# Altium PCB InvestiGator.PcbDoc
Units mil, origin at the board's own origin, x right, y up, seen from the top; angles counter-clockwise.
Board outline 4000 x 3000 mil, 2 copper layers (Top Layer, Bottom Layer); 85 components, 52 nets, 300 pads, 6 vias.
Unrouted connection lines stored in the file: 1.
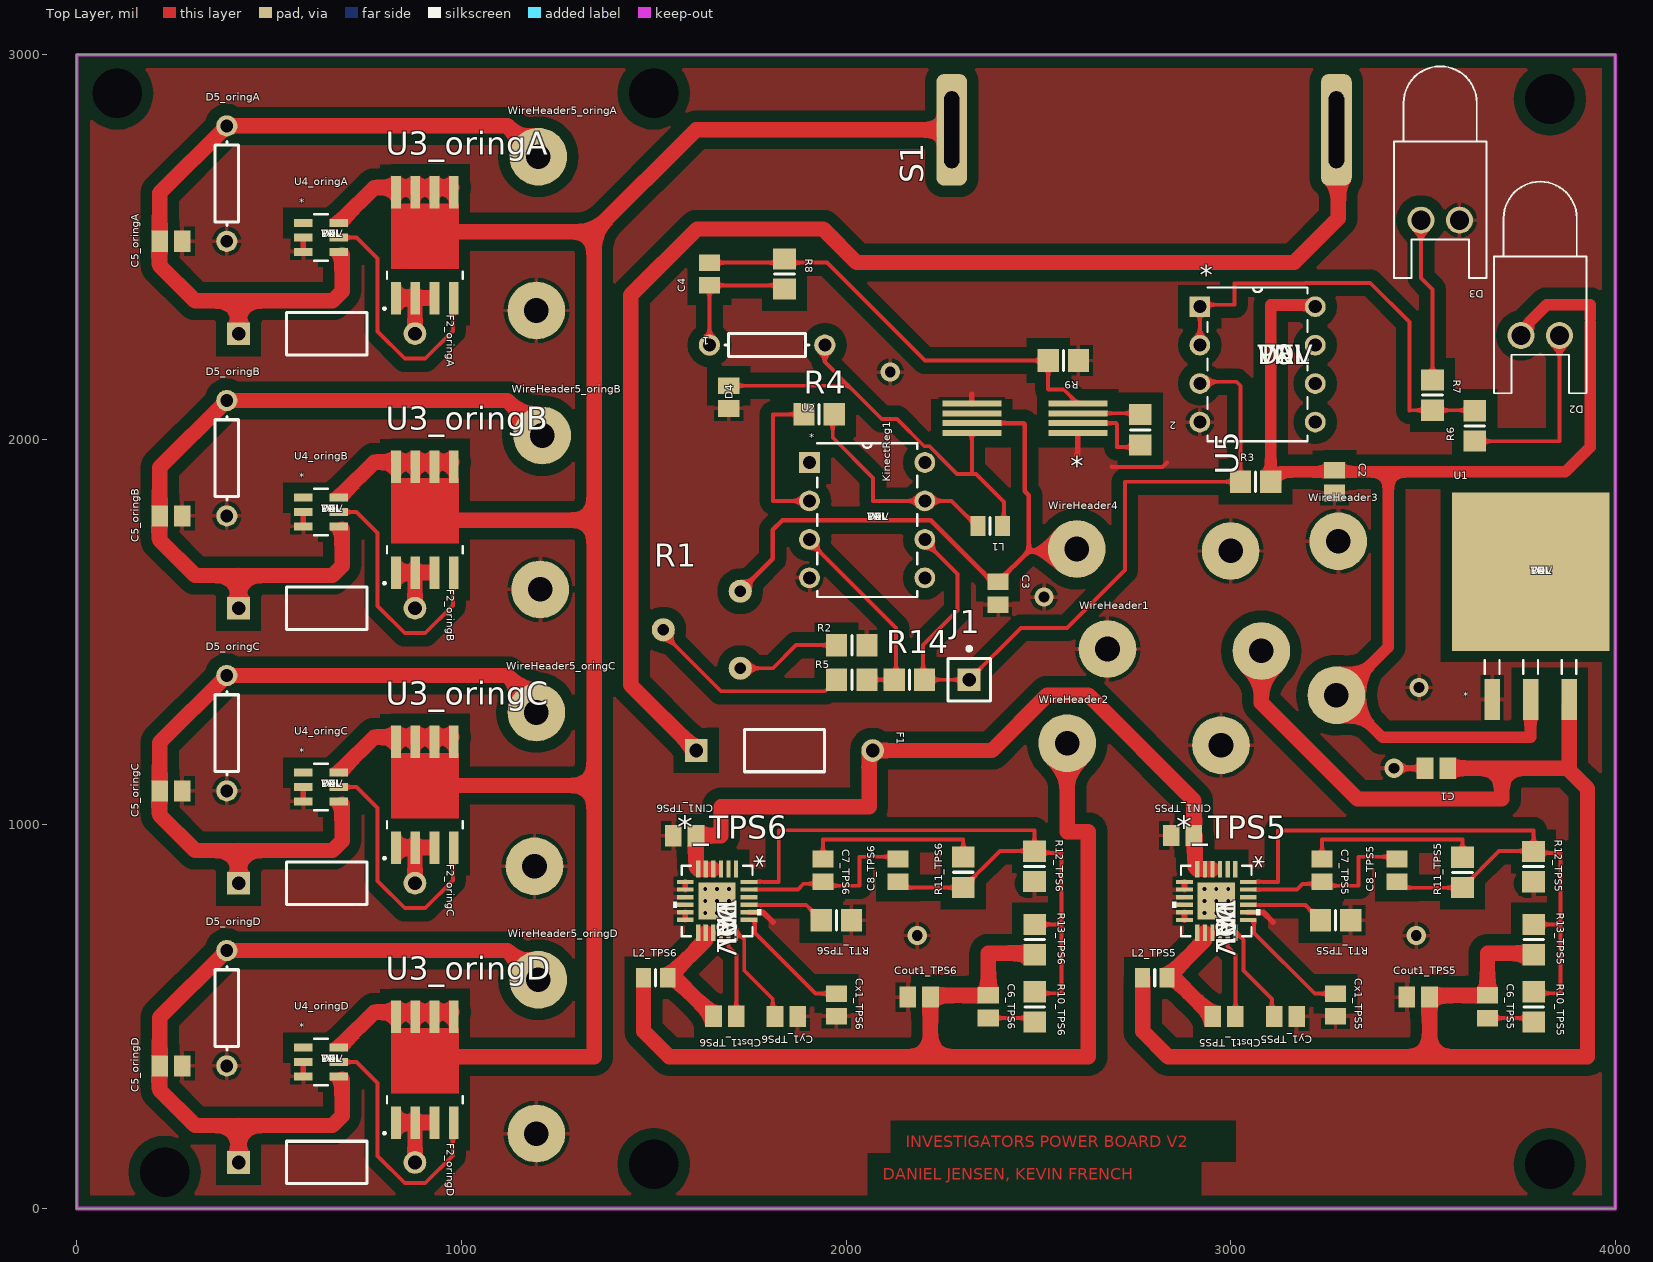
[diagram p0: Top Layer view]
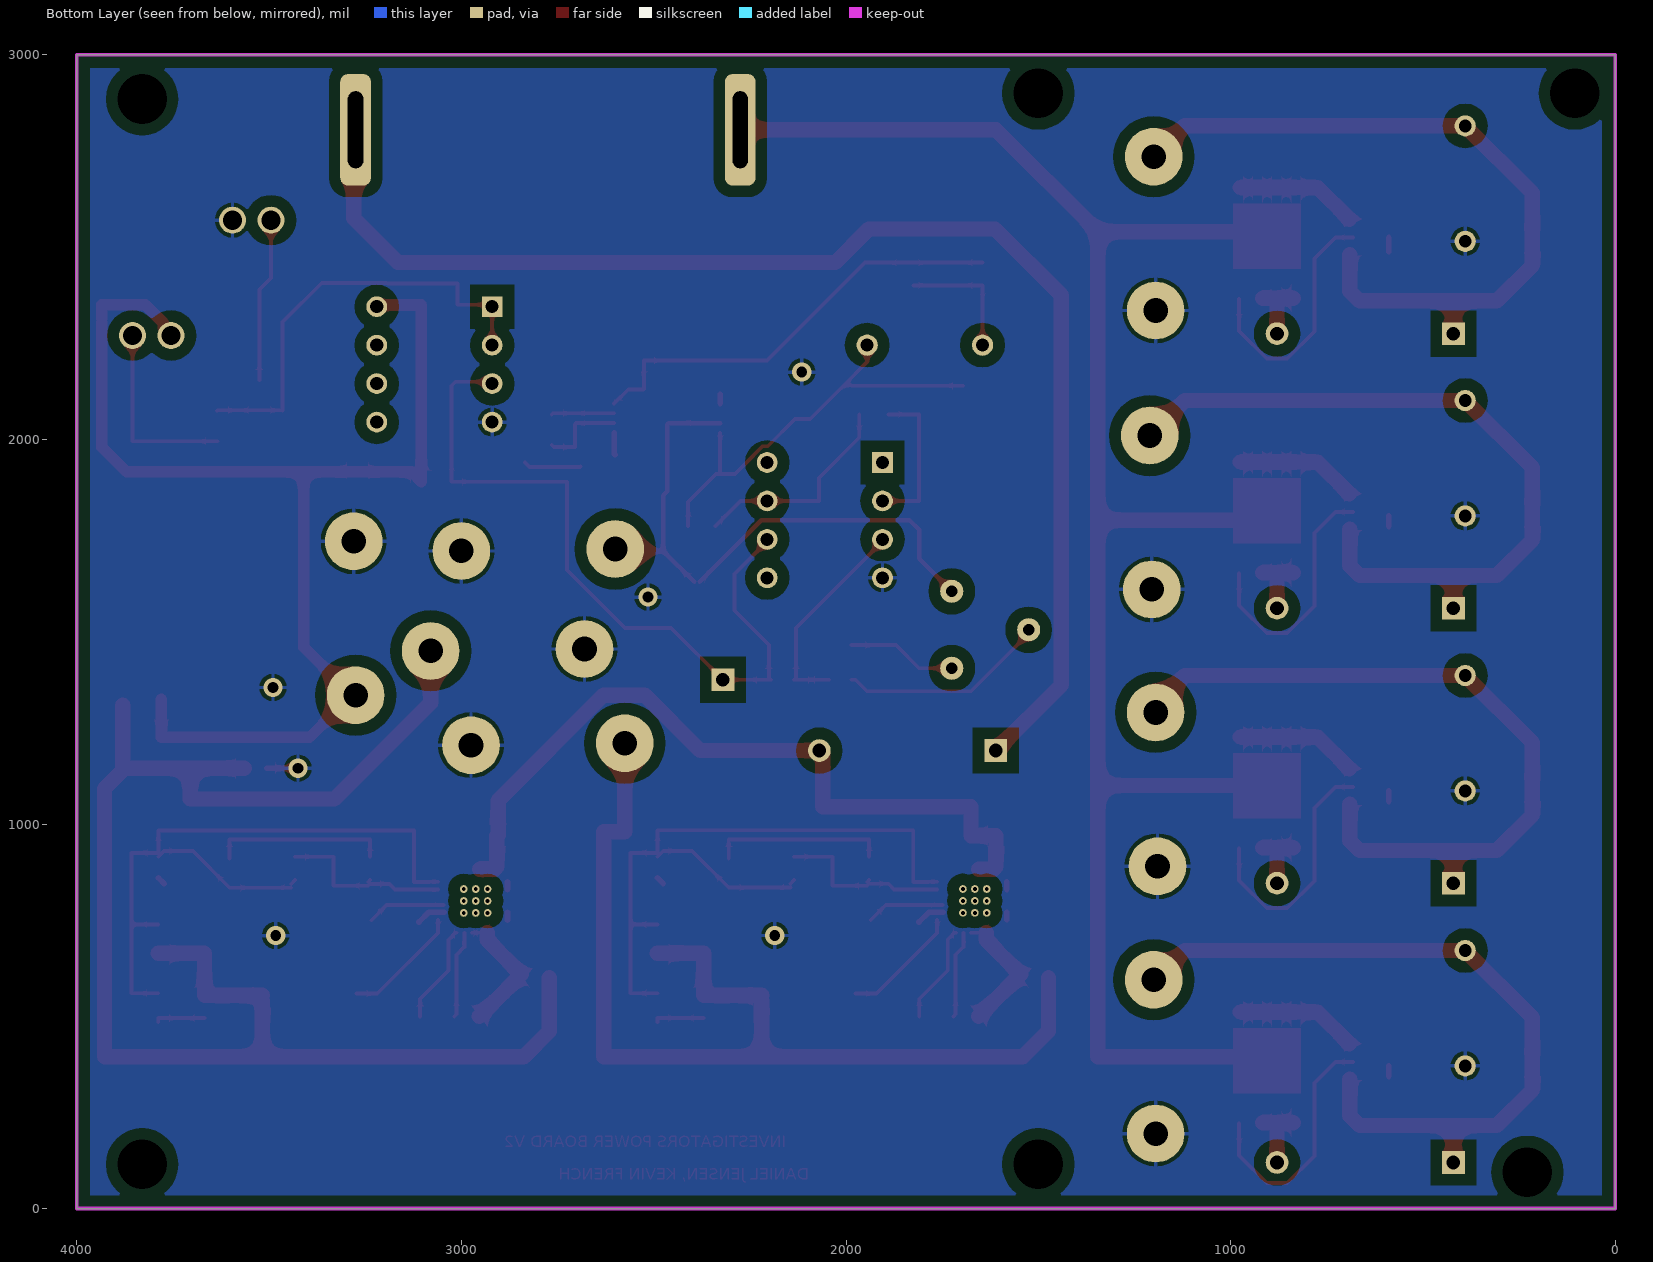
[diagram p1: Bottom Layer view, seen from below]

## Layer stack, top to bottom
Top Solder: solder mask 0.4, Solder Resist, Dk 3.5
Top Layer: signal copper 1.4
Dielectric1: dielectric 12.6, FR-4, Dk 4.8
Bottom Layer: signal copper 1.4
Bottom Solder: solder mask 0.4, Solder Resist, Dk 3.5

## Board outline
0,0 0,3000 4000,3000 4000,0

## Design rules (kind name [scope] priority, off if disabled: settings)
Clearance "Schematic Clearance Constraint_41" [InNet('Net*_TPS6_13')] p1: gap=30
Clearance "Schematic Clearance Constraint_40" [InNet('NetF2_oringA_2')] p2: gap=30
Clearance "Schematic Clearance Constraint_39" [InNet('BAT_oringD')] p3: gap=30
Clearance "Schematic Clearance Constraint_37" [InNet('NetF2_oringB_2')] p4: gap=30
Clearance "Schematic Clearance Constraint_35" [InNet('BAT_oringA')] p5: gap=30
Clearance "Schematic Clearance Constraint_38" [InNet('NetF2_oringD_2')] p6: gap=30
Clearance "Schematic Clearance Constraint_36" [InNet('NetF2_oringA_2')] p7: gap=30
Clearance "Schematic Clearance Constraint_34" [InNet('BAT_oringD')] p8: gap=30
Clearance "Schematic Clearance Constraint_32" [InNet('BAT_oringC')] p9: gap=30
Clearance "Schematic Clearance Constraint_33" [InNet('NetF2_oringB_2')] p10: gap=30
Clearance "Schematic Clearance Constraint_31" [InNet('BAT_oringD')] p11: gap=30
Clearance "Schematic Clearance Constraint_30" [InNet('NetF2_oringD_2')] p12: gap=30
Clearance "Schematic Clearance Constraint_25" [InNet('BAT_oringC')] p13: gap=30
Clearance "Schematic Clearance Constraint_29" [InNet('NetF2_oringA_2')] p14: gap=30
Clearance "Schematic Clearance Constraint_28" [InNet('BAT_oringA')] p15: gap=30
Clearance "Schematic Clearance Constraint_27" [InNet('NetF2_oringD_2')] p16: gap=30
Clearance "Schematic Clearance Constraint_26" [InNet('BAT_oringC')] p17: gap=30
Clearance "Schematic Clearance Constraint_24" [InNet('NetF2_oringB_2')] p18: gap=30
Clearance "Schematic Clearance Constraint_23" [InNet('NetF2_oringA_2')] p19: gap=30
Clearance "Schematic Clearance Constraint_22" [InNet('BAT_oringA')] p20: gap=30
Clearance "Schematic Clearance Constraint_21" [InNet('BAT_oringD')] p21: gap=30
Clearance "Schematic Clearance Constraint_19" [InNet('BAT_oringA')] p22: gap=30
Clearance "Schematic Clearance Constraint_20" [InNet('BAT_oringC')] p23: gap=30
Clearance "Schematic Clearance Constraint_5" [InNet('NetF2_oringD_2')] p24: gap=30
Clearance "Schematic Clearance Constraint_18" [InNet('NetF2_oringD_2')] p25: gap=30
Clearance "Schematic Clearance Constraint_17" [InNet('BAT_oringC')] p26: gap=30
Clearance "Schematic Clearance Constraint_15" [InNet('NetF2_oringB_2')] p27: gap=30
Clearance "Schematic Clearance Constraint_16" [InNet('Net*_TPS6_13')] p28: gap=30
Clearance "Schematic Clearance Constraint_14" [InNet('NetF2_oringB_2')] p29: gap=30
Clearance "Schematic Clearance Constraint_13" [InNet('NetF2_oringC_2')] p30: gap=30
Clearance "Schematic Clearance Constraint_12" [InNet('NetF2_oringD_2')] p31: gap=30
Clearance "Schematic Clearance Constraint_11" [InNet('NetF1_1')] p32: gap=30
Clearance "Schematic Clearance Constraint_10" [InNet('Net*_TPS5_3')] p33: gap=30
Clearance "Schematic Clearance Constraint_9" [InNet('12VREG')] p34: gap=30
Clearance "Schematic Clearance Constraint_8" [InNet('6V')] p35: gap=30
Clearance "Schematic Clearance Constraint_7" [InNet('5V')] p36: gap=30
Clearance "Schematic Clearance Constraint_6" [InNet('3.3V')] p37: gap=30
Clearance "Schematic Clearance Constraint_4" [InNet('BAT_oringC')] p38: gap=30
Clearance "Schematic Clearance Constraint_3" [InNet('BAT_oringB')] p39: gap=30
Clearance "Schematic Clearance Constraint_2" [InNet('GND')] p40: gap=30
Clearance "Schematic Clearance Constraint_1" [InNet('BAT_oringA')] p41: gap=30
Clearance "Schematic Clearance Constraint" [InNetClass('VORED[1..4]')] p42: gap=30
Clearance [InPolygon] p43: gap=20
Clearance Clearance_1 [All] p44: gap=10
PolygonConnect [All] p1: connectstyle=Relief reliefconductorwidth=10 reliefentries=4 polygonreliefangle="90 Angle" airgapwidth=10
RoomDefinition power [InComponentClass('power')] p1: confinementstyle=ConfineIn formatcopy=TRUE lockcomponents=FALSE outline 1334.53,1101 4025,1101 4025,2990 1334.53,2990
RoomDefinition TPS5 [InComponentClass('TPS5')] p2: confinementstyle=ConfineIn formatcopy=TRUE lockcomponents=FALSE outline 3997.76,1029.85 2727.76,1029.85 2727.76,339.85 3997.76,339.85
RoomDefinition TPS6 [InComponentClass('TPS6')] p3: confinementstyle=ConfineIn formatcopy=TRUE lockcomponents=FALSE outline 2700,1030 1430,1030 1430,340 2700,340
RoomDefinition oringD [InComponentClass('oringD')] p4: confinementstyle=ConfineIn formatcopy=TRUE lockcomponents=FALSE outline 160,11.08 1300,11.08 1300,710 160,710
RoomDefinition oringC [InComponentClass('oringC')] p5: confinementstyle=ConfineIn formatcopy=TRUE lockcomponents=FALSE outline 160,726.08 1300,726.08 1300,1425 160,1425
RoomDefinition oringB [InComponentClass('oringB')] p6: confinementstyle=ConfineIn formatcopy=TRUE lockcomponents=FALSE outline 160,1441.08 1300,1441.08 1300,2140 160,2140
RoomDefinition oringA [InComponentClass('oringA')] p7: confinementstyle=ConfineIn formatcopy=TRUE lockcomponents=FALSE outline 160,2155 1300,2155 1300,2853.92 160,2853.92
RoutingVias [All] p1: holewidth=28 width=50 viastyle="Through Hole" minholewidth=28 minwidth=50 maxholewidth=28 maxwidth=50
SolderMaskExpansion [All] p1: expansion=4
Width "Schematic Width Constraint_20" [InNet('Net*_TPS5_3')] p1: maxlimit=40 minlimit=40 preferedwidth=40
Width "Schematic Width Constraint_19" [InNet('Net*_TPS6_13')] p2: maxlimit=40 minlimit=40 preferedwidth=40
Width "Schematic Width Constraint_18" [InNet('Net*_TPS5_13')] p3: maxlimit=40 minlimit=40 preferedwidth=40
Width "Schematic Width Constraint_17" [InNet('NetF2_oringA_2')] p4: maxlimit=40 minlimit=40 preferedwidth=40
Width "Schematic Width Constraint_16" [InNet('NetF2_oringB_2')] p5: maxlimit=40 minlimit=40 preferedwidth=40
Width "Schematic Width Constraint_15" [InNet('NetF2_oringD_2')] p6: maxlimit=40 minlimit=40 preferedwidth=40
Width "Schematic Width Constraint_14" [InNet('NetF2_oringC_2')] p7: maxlimit=40 minlimit=40 preferedwidth=40
Width "Schematic Width Constraint_13" [InNet('Net*_TPS5_3')] p8: maxlimit=40 minlimit=40 preferedwidth=40
Width "Schematic Width Constraint_12" [InNet('NetCIN1_TPS5_1')] p9: maxlimit=40 minlimit=40 preferedwidth=40
Width "Schematic Width Constraint_11" [InNet('NetCIN1_TPS5_1')] p10: maxlimit=40 minlimit=40 preferedwidth=40
Width "Schematic Width Constraint_5" [InNet('GND')] p11: maxlimit=15 minlimit=15 preferedwidth=15
Width "Schematic Width Constraint_10" [InNetClass('VORED[1..4]')] p12: maxlimit=40 minlimit=40 preferedwidth=40
Width "Schematic Width Constraint_4" [InNet('NetF1_1')] p13: maxlimit=40 minlimit=40 preferedwidth=40
Width "Schematic Width Constraint_9" [InNet('BAT_oringC')] p14: maxlimit=40 minlimit=40 preferedwidth=40
Width "Schematic Width Constraint_8" [InNet('BAT_oringB')] p15: maxlimit=40 minlimit=40 preferedwidth=40
Width "Schematic Width Constraint_7" [InNet('BAT_oringD')] p16: maxlimit=40 minlimit=40 preferedwidth=40
Width "Schematic Width Constraint_6" [InNet('BAT_oringA')] p17: maxlimit=40 minlimit=40 preferedwidth=40
Width "Schematic Width Constraint_3" [InNet('6V')] p18: maxlimit=40 minlimit=40 preferedwidth=40
Width "Schematic Width Constraint_2" [InNet('5V')] p19: maxlimit=40 minlimit=40 preferedwidth=40
Width "Schematic Width Constraint_1" [InNet('3.3V')] p20: maxlimit=30 minlimit=30 preferedwidth=30
Width "Schematic Width Constraint" [InNet('12VREG')] p21: maxlimit=16 minlimit=12 preferedwidth=15
Width [All] p22: maxlimit=10 minlimit=10 preferedwidth=10
30 further rules are at their usual default settings.

## Classes and differential pairs
component class oringA: C5_oringA D5_oringA F2_oringA U3_oringA U4_oringA WireHeader5_oringA
component class oringB: C5_oringB D5_oringB F2_oringB U3_oringB U4_oringB WireHeader5_oringB
component class oringC: C5_oringC D5_oringC F2_oringC U3_oringC U4_oringC WireHeader5_oringC
component class oringD: C5_oringD D5_oringD F2_oringD U3_oringD U4_oringD WireHeader5_oringD
component class power: 1 2 C1 C2 C3 C4 D2 D3 D4 F1 J1 KinectReg1 L1 R1 R2 R3 R4 R5 R6 R7 R8 R9 R14 S1 U1 U2 U5 WireHeader1 WireHeader2 WireHeader3 WireHeader4
component class TPS5: *_TPS5 C6_TPS5 C7_TPS5 C8_TPS5 Cbst1_TPS5 CIN1_TPS5 Cout1_TPS5 Cx1_TPS5 Cy1_TPS5 L2_TPS5 R10_TPS5 R11_TPS5 R12_TPS5 R13_TPS5 RT1_TPS5
net class VORED[1..4]: VORED4
channel class oring_circuit: oringA oringB oringC oringD
component class TPS6: *_TPS6 C6_TPS6 C7_TPS6 C8_TPS6 Cbst1_TPS6 CIN1_TPS6 Cout1_TPS6 Cx1_TPS6 Cy1_TPS6 L2_TPS6 R10_TPS6 R11_TPS6 R12_TPS6 R13_TPS6 RT1_TPS6
channel class TPS5313: TPS5 TPS6

## Components (designator, comment, footprint, x,y, rotation, side; value= is the part's Value field where it differs from the comment)
1 "Cap Pol3" C0805 1695,2110 r270 top
2 "Res3" 6-0805_M 2765,2025 r270 top
*_TPS5 "TPS53313" RGE24_2P45X2P45 2962.76,799.84 r270 top (schematic designator *)
*_TPS6 "TPS53313" RGE24_2P45X2P45 1665,800 r270 top (schematic designator *)
C1 "Cap Pol3" C0805 3535,1145 r180 top
C2 "Cap Pol3" C0805 3270,1890 r270 top
C3 "Cap Pol3" C0805 2395,1600 r270 top
C4 "Cap Pol3" C0805 1645,2430 r90 top
C5_oringA "Cap" C0805 245,2515 r180 top (schematic designator C5)
C5_oringB "Cap" C0805 245,1801.08 r180 top (schematic designator C5)
C5_oringC "Cap" C0805 245,1086.08 r180 top (schematic designator C5)
C5_oringD "Cap" C0805 245,371.08 r180 top (schematic designator C5)
C6_TPS5 "Cap" C0805 3667.76,524.85 r270 top (schematic designator C6)
C6_TPS6 "Cap" C0805 2370,525 r270 top (schematic designator C6)
C7_TPS5 "Cap" C0805 3237.76,879.41 r270 top (schematic designator C7)
C7_TPS6 "Cap" C0805 1940,879.57 r270 top (schematic designator C7)
C8_TPS5 "Cap" C0805 3432.76,879.41 r90 top (schematic designator C8)
C8_TPS6 "Cap" C0805 2135,879.57 r90 top (schematic designator C8)
Cbst1_TPS5 "Cap" C0805 2982.76,499.85 r0 top (schematic designator Cbst1)
Cbst1_TPS6 "Cap" C0805 1685,500 r0 top (schematic designator Cbst1)
CIN1_TPS5 "Cap" C0805 2875,970 r180 top (schematic designator CIN1)
CIN1_TPS6 "Cap" C0805 1580.43,969.57 r180 top (schematic designator CIN1)
Cout1_TPS5 "Cap" C0805 3487.76,549.85 r180 top (schematic designator Cout1)
Cout1_TPS6 "Cap" C0805 2190,550 r180 top (schematic designator Cout1)
Cx1_TPS5 "Cap" C0805 3272.76,529.41 r90 top (schematic designator Cx1)
Cx1_TPS6 "Cap" C0805 1975,529.57 r90 top (schematic designator Cx1)
Cy1_TPS5 "Cap" C0805 3142.76,499.41 r0 top (schematic designator Cy1)
Cy1_TPS6 "Cap" C0805 1845,499.57 r0 top (schematic designator Cy1)
D2 "LED0" LED-0 3805,2270 r180 top
D3 "LED0" LED-0 3545,2570 r180 top
D4 "D Schottky" AXIAL-0.3 1795,2245 r180 top
D5_oringA "D Schottky" AXIAL-0.3 390,2665 r90 top (schematic designator D5)
D5_oringB "D Schottky" AXIAL-0.3 390,1951.08 r90 top (schematic designator D5)
D5_oringC "D Schottky" AXIAL-0.3 390,1236.08 r90 top (schematic designator D5)
D5_oringD "D Schottky" AXIAL-0.3 390,521.08 r90 top (schematic designator D5)
F1 "Fuse 2" PIN-W2/E2.8 1840,1191 r0 top
F2_oringA "Fuse 2" PIN-W2/E2.8 650,2275 r0 top (schematic designator F2)
F2_oringB "Fuse 2" PIN-W2/E2.8 650,1561.08 r0 top (schematic designator F2)
F2_oringC "Fuse 2" PIN-W2/E2.8 650,846.08 r0 top (schematic designator F2)
F2_oringD "Fuse 2" PIN-W2/E2.8 650,120 r0 top (schematic designator F2)
J1 "Socket" PIN1 2320,1375 r0 top
KinectReg1 "LMR61428" D8 2465,2055 r180 top
L1 "Inductor" 6-0805_L 2375,1775 r180 top
L2_TPS5 "Inductor" 6-0805_L 2802.76,599.85 r0 top (schematic designator L2)
L2_TPS6 "Inductor" 6-0805_L 1505,600 r0 top (schematic designator L2)
R1 "RPot" RPot 1725,1505 r270 top
R2 "Res3" 6-0805_M 2015,1465 r180 top
R3 "Res3" 6-0805_M 3065,1890 r0 top
R4 "Res3" 6-0805_M 1930,2065 r0 top
R5 "Res3" 6-0805_M 2015,1375 r0 top
R6 "Res3" 6-0805_M 3635,2035 r90 top
R7 "Res3" 6-0805_M 3525,2115 r270 top
R8 "Res3" 6-0805_M 1840,2430 r270 top
R9 "Res3" 6-0805_M 2565,2205 r180 top
R10_TPS5 "Res3" 6-0805_M 3788.19,524.41 r90 top (schematic designator R10)
R10_TPS6 "Res3" 6-0805_M 2490.43,524.57 r90 top (schematic designator R10)
R11_TPS5 "Res3" 6-0805_M 3602.76,874.41 r90 top (schematic designator R11)
R11_TPS6 "Res3" 6-0805_M 2305,874.57 r90 top (schematic designator R11)
R12_TPS5 "Res3" 6-0805_M 3787.76,889.41 r90 top (schematic designator R12)
R12_TPS6 "Res3" 6-0805_M 2490,889.57 r90 top (schematic designator R12)
R13_TPS5 "Res3" 6-0805_M 3788.19,699.41 r90 top (schematic designator R13)
R13_TPS6 "Res3" 6-0805_M 2490.43,699.57 r90 top (schematic designator R13)
R14 "Res3" 6-0805_M 2165,1375 r0 top
RT1_TPS5 "Res3" 6-0805_M 3272.76,749.85 r180 top (schematic designator RT1)
RT1_TPS6 "Res3" 6-0805_M 1975,750 r180 top (schematic designator RT1)
S1 "SW-SPST" switch 2775,2805 r90 top
U1 "LM1084_KTT_3" TS3B 3780,1650 r0 top
U2 "TLV3401_P_8" P8 2205,1640 r0 top
U3_oringA "CSD17522Q5A_DQJ_" DQJ8 905,2505 r90 top (schematic designator U3)
U3_oringB "CSD17522Q5A_DQJ_" DQJ8 905,1791.08 r90 top (schematic designator U3)
U3_oringC "CSD17522Q5A_DQJ_" DQJ8 905,1076.08 r90 top (schematic designator U3)
U3_oringD "CSD17522Q5A_DQJ_" DQJ8 905,361.08 r90 top (schematic designator U3)
U4_oringA "LM5050-2_DDC_6" MK06A 635,2525 r0 top (schematic designator U4)
U4_oringB "LM5050-2_DDC_6" MK06A 635,1811.08 r0 top (schematic designator U4)
U4_oringC "LM5050-2_DDC_6" MK06A 635,1096.08 r0 top (schematic designator U4)
U4_oringD "LM5050-2_DDC_6" MK06A 635,381.08 r0 top (schematic designator U4)
U5 "LT1632CN8" P8 3220,2045 r0 top
WireHeader1 "14 Gauge WIre" WireHeader 3080,1450 r180 top
WireHeader2 "14 Gauge WIre" WireHeader 2575,1210 r0 top
WireHeader3 "14 Gauge WIre" WireHeader 3275,1335 r90 top
WireHeader4 "14 Gauge WIre" WireHeader 2600,1715 r0 top
WireHeader5_oringA "14 Gauge WIre" WireHeader 1195,2335 r90 top (schematic designator WireHeader5)
WireHeader5_oringB "14 Gauge WIre" WireHeader 1205,1610 r90 top (schematic designator WireHeader5)
WireHeader5_oringC "14 Gauge WIre" WireHeader 1190,890 r90 top (schematic designator WireHeader5)
WireHeader5_oringD "14 Gauge WIre" WireHeader 1195,195 r90 top (schematic designator WireHeader5)

## Footprints (in the part's own frame and the unit in brackets; to place one, negate y for a bottom-side part, rotate by r counter-clockwise, add the part's x,y. Pads: shape width x height; smd on the part's side, far side on the other; paste and mask are expansions set on the pad)
6-0805_L [mm] "Chip Resistor, Body 2.0x1.2mm, IPC High Density"
  rect 1x1.3 smd: 1(-0.8,0) 2(0.8,0)
  silkscreen extent 0,-0.55 0,0.55, body extent -1.07,-0.7 1.07,0.7, height 0.7
6-0805_M [mm] "Chip Resistor, Body 2.0x1.2mm, IPC Low Density"
  rect 1.4x1.5 smd: 1(-1,0) 2(1,0)
  silkscreen extent 0,-0.65 0,0.65, body extent -1.07,-0.7 1.07,0.7, height 0.7
AXIAL-0.3 [mm] "Axial Device, Thru-Hole; 2 Leads; 0.3 in Pin Spacing"
  round 1.4 hole 0.85: 1(-3.81,0) 2(3.81,0)
  silkscreen extent -2.77,-0.76 2.77,0.76
C0805 [mm] "Chip Capacitor, Body 2.0x1.3mm, IPC High Density"
  rect 1.1x1.4 smd: 1(-0.75,0) 2(0.75,0)
  body extent -1.1,-0.72 1.1,0.72, height 1.4
D8 [mm]
  rect 3.9x0.4 smd: 1(-3.5,0.975) 2(-3.5,0.325) 3(-3.5,-0.325) 4(-3.5,-0.975) 5(3.5,-0.975) 6(3.5,-0.325) 7(3.5,0.325) 8(3.5,0.975)
DQJ8 [mm]
  rect 2.154x0.65 smd paste-0.1: 1(-3.497,1.905) 2(-3.497,0.635) 3(-3.497,-0.635) 4(-3.497,-1.905) 5(3.497,-1.905) 6(3.497,-0.635) 7(3.497,0.635) 8(3.497,1.905)
  Top Layer region: 2.745,0 2.745,2.23 -1.545,2.23 -1.545,0
  Top Layer region: 2.745,0 2.745,-2.23 -1.545,-2.23 -1.545,0
  silkscreen extent -4.27,-2.5 -1.74,2.74
LED-0 [mil] "LED; 2 Leads"
  round 70 hole 50: 1(50,0) 2(-50,0)
  silkscreen extent -120,-400 120,150
MK06A [mil]
  rect 48x21 smd: 1(-46,37.4) 2(-46,0) 3(-46,-37.4) 4(46,-37.4) 5(46,0) 6(46,37.4)
  silkscreen extent -18,-60 18,60
P8 [mil]
  rect 54x54 / inner round 60 / far side rect 54x54 hole 34: 1(-300,300)
  round 54 / inner round 60 / far side round 54 hole 34: 2(-300,200) 3(-300,100) 4(-300,0) 5(0,0) 6(0,100) 7(0,200) 8(0,300)
  silkscreen extent -280,-50 -20,350
PIN1 [mm] "Connector; Plug"
  rect 1.5x1.5 hole 0.9: 1(0,0)
  silkscreen extent -1.4,-1.4 1.4,2.17
PIN-W2/E2.8 [mm] "Thru-Hole; 2 Leads"
  rect 1.5x1.5 hole 0.9: 1(-5.825,0)
  round 1.5 hole 0.9: 2(5.825,0)
  silkscreen extent -2.65,-1.4 2.65,1.4
RGE24_2P45X2P45 [mil]
  rect 43.47x11.02 smd paste-5.51: 1(-82.76,49.21) 2(-82.76,29.53) 3(-82.76,9.84) 4(-82.76,-9.84) 5(-82.76,-29.53) 6(-82.76,-49.21) 13(82.76,-49.21) 14(82.76,-29.53) 15(82.76,-9.84) 16(82.76,9.84) 17(82.76,29.53) 18(82.76,49.21)
  rect 11.02x43.47 smd paste-5.51: 7(-49.23,-82.76) 8(-29.54,-82.76) 9(-9.85,-82.76) 10(9.84,-82.76) 11(29.53,-82.76) 12(49.22,-82.76) 19(49.22,82.76) 20(29.53,82.76) 21(9.84,82.76) 22(-9.85,82.76) 23(-29.54,82.76) 24(-49.23,82.76)
  rect 96.46x96.46 smd paste-47.73 mask-47.5: 25(0,0)
  round 20 / inner round 60 / far side round 20 hole 10: V(-31,31) V(-31,0) V(-31,-31) V(0,31) V(0,0) V(0,-31) V(31,31) V(31,0) V(31,-31)
  silkscreen extent -92,-114 92,114
RPot [mil]
  round 60 hole 30: 1(100,0) 2(-100,0) 3(0,-200)
switch [mil]
  rrect50% 290x80 hole 40 slot 200 at 0 deg: 1(0,500) 2(0,-500)
TS3B [mil]
  rect 40x106 smd: 1(-100,-326) 2(0,-326) 3(100,-326)
  rect 410x412 smd: 4(0,6)
  silkscreen extent -119,-259 119,-224
WireHeader [mil]
  round 150 hole 64: 1(0,0) 2(400,-5)

## Part data
1 C1 C2 C3 C4: "Polarized Capacitor (Surface Mount)"
2 R2 R3 R4 R5 R6 R7 R8 R9 R10_TPS5 R10_TPS6 R11_TPS5 R11_TPS6 R12_TPS5 R12_TPS6 R13_TPS5 R13_TPS6 R14 RT1_TPS5 RT1_TPS6: "Resistor"
C5_oringA C5_oringB C5_oringC C5_oringD C6_TPS5 C6_TPS6 C7_TPS5 C7_TPS6 C8_TPS5 C8_TPS6 Cbst1_TPS5 Cbst1_TPS6 CIN1_TPS5 CIN1_TPS6 Cout1_TPS5 Cout1_TPS6 Cx1_TPS5 Cx1_TPS6 Cy1_TPS5 Cy1_TPS6: "Capacitor"
D2 D3: "Typical INFRARED GaAs LED"
D4 D5_oringA D5_oringB D5_oringC D5_oringD: "Schottky Diode"
F1 F2_oringA F2_oringB F2_oringC F2_oringD: "Fuse"
R1: "Potentiometer"
S1: "Single-Pole, Single-Throw Switch"
U1 U2 U3_oringA U3_oringB U3_oringC U3_oringD U4_oringA U4_oringB U4_oringC U4_oringD: "Imported"
U5: "45MHz, 45V/µs, Dual Rail-to-Rail Input and Output Precision Operational Amplifier"
WireHeader1 WireHeader2 WireHeader3 WireHeader4 WireHeader5_oringA WireHeader5_oringB WireHeader5_oringC WireHeader5_oringD: library part WireHeader

## Free pads (board coordinates)
  round 60 hole 129: 0(3830,2885) 1(1500,2900) 2(105,2900) 4(1500,115) 5(3830,115)
  round 0 hole 129: 3(228.4,95)

## Via types
v1: diameter 50, hole 28, Top Layer to Bottom Layer, 6 vias

## Nets (pads, with @x,y where several pads share a name; then routed paths per layer and width w, separated by ;. In a path a pad name is that pad's centre, name@x,y a point inside that pad or via, vN(x,y) a via of type N, cw(c..) or ccw(c..) an arc to the next point about the centre after c; other vN are vias at no path point)
3.3V: C2.1 D2.1 R3.2 U1.2 U5.8 WireHeader3.1 | length 3294
  Top Layer w30: U5.8@3220,2350 3219.37,2349.37 3104.37,2349.37 R3.2 3129.84,1915.47 3410,1915.47 ; D2.1 3775,2290 3775,2303.14 3821.86,2350 3935,2350 3935,2315 ; U1.2 3780,1225 3395,1225 3285,1335 3410,1460 3410,1915.47 ; 3935,2303.14 3935,1980 3870.47,1915.47 3410,1915.47
5V: C1.1 C6_TPS5.1 Cout1_TPS5.1 L2_TPS5.1 R13_TPS5.1 U1.3 WireHeader1.1 | length 4040.6
  Top Layer w40: L2_TPS5.1 2771.26,461.34 2837.76,394.85 3517.28,394.85 ; WireHeader1.1 3080,1315 3330,1065 3705,1065 3705,1145 ; Cout1_TPS5.1@3517.28,539.84 3517.28,394.85 ; Cout1_TPS5.1@3517.28,554.37 C6_TPS5.1 3667.76,663.98 ; C1.1 3705,1145 ; 3668.19,663.98 R13_TPS5.1@3788.19,663.98 ; 3880,1145 3705,1145 ; U1.3@3880,1309 3880,1140 3927.76,1092.24 3927.76,394.85 3517.28,394.85
6V: C6_TPS6.1 Cout1_TPS6.1 L2_TPS6.1 R13_TPS6.1 WireHeader2.1 | length 2717.6
  Top Layer w40: L2_TPS6.1 1473.5,461.5 1540,395 2219.53,395 ; Cout1_TPS6.1@2219.53,540 2219.53,395 ; Cout1_TPS6.1@2219.53,554.53 C6_TPS6.1 2370,664.13 ; 2370.43,664.13 R13_TPS6.1@2490.43,664.13 ; WireHeader2.1 2575,980 2630,980 2630,395 2219.53,395
12VREG: C3.1 KinectReg1.7 R1.2 WireHeader4.1 | length 1547.5
  Top Layer w12: R1.2 1810,1690 1810,1765 1835,1790 2220,1790 C3.1@2380,1630 ; KinectReg1.7 2462.2,2042.2 2465,2039.41 2465,1865 2475,1855 2475,1709.53 ; C3.1 2475,1709.53 ; WireHeader4.1@2594.53,1709.53 2475,1709.53
12VUNREG: L1.2 R4.2 U2.7 | length 564.8
  Top Layer w10: R4.2@1965.43,2065 1965.43,2004.57 2070,1900 2070,1840 2200,1840 2274.57,1840 L1.2@2339.57,1775
BAT_oringA: C5_oringA.2 D5_oringA.2 F2_oringA.1 U4_oringA.4 WireHeader5_oringA.2 | length 1981.1
  Top Layer w40: F2_oringA.1 420.67,2360 ; U4_oringA.4@690,2480 690,2385 665,2360 420.67,2360 ; WireHeader5_oringA.2 1120,2815 D5_oringA.2 215.47,2640.47 C5_oringA.2 215.47,2452.56 308.03,2360 420.67,2360
BAT_oringB: C5_oringB.2 D5_oringB.2 F2_oringB.1 U4_oringB.4 WireHeader5_oringB.2 | length 1981.1
  Top Layer w40: F2_oringB.1 420.67,1646.08 ; U4_oringB.4@690,1766.08 690,1671.08 665,1646.08 420.67,1646.08 ; WireHeader5_oringB.2@1200,2021.08 1120,2101.08 D5_oringB.2 215.47,1926.55 C5_oringB.2 215.47,1738.64 308.03,1646.08 420.67,1646.08
BAT_oringC: C5_oringC.2 D5_oringC.2 F2_oringC.1 U4_oringC.4 WireHeader5_oringC.2 | length 1981.1
  Top Layer w40: F2_oringC.1 420.67,931.08 ; U4_oringC.4@690,1051.08 690,956.08 665,931.08 420.67,931.08 ; WireHeader5_oringC.2@1200,1306.08 1120,1386.08 D5_oringC.2 215.47,1211.55 C5_oringC.2 215.47,1023.64 308.03,931.08 420.67,931.08
BAT_oringD: C5_oringD.2 D5_oringD.2 F2_oringD.1 U4_oringD.4 WireHeader5_oringD.2 | length 1981.1
  Top Layer w40: F2_oringD.1@420.67,131.08 420.67,216.08 ; U4_oringD.4@690,336.08 690,241.08 665,216.08 420.67,216.08 ; WireHeader5_oringD.2@1200,591.08 1120,671.08 D5_oringD.2 215.47,496.55 C5_oringD.2 215.47,308.64 308.03,216.08 420.67,216.08
GND: 1.2 *_TPS5.7 *_TPS5.8 *_TPS5.9 *_TPS5.10 *_TPS5.11 *_TPS5.12 *_TPS5.20 *_TPS6.7 *_TPS6.8 *_TPS6.9 *_TPS6.10 *_TPS6.11 *_TPS6.12 *_TPS6.20 C1.2 C2.2 C3.2 C5_oringA.1 C5_oringB.1 C5_oringC.1 C5_oringD.1 CIN1_TPS5.2 CIN1_TPS6.2 Cout1_TPS5.2 Cout1_TPS6.2 Cx1_TPS5.1 Cx1_TPS6.1 Cy1_TPS5.2 Cy1_TPS6.2 D3.2 D5_oringA.1 D5_oringB.1 D5_oringC.1 D5_oringD.1 KinectReg1.1 KinectReg1.5 R2.1 R9.1 R12_TPS5.1 R12_TPS6.1 RT1_TPS5.1 RT1_TPS6.1 U1.1 U2.4 U4_oringA.2 U4_oringA.3 U4_oringB.2 U4_oringB.3 U4_oringC.2 U4_oringC.3 U4_oringD.2 U4_oringD.3 U5.4 WireHeader1.2 WireHeader2.2 WireHeader3.2 WireHeader4.2 WireHeader5_oringA.1 WireHeader5_oringB.1 WireHeader5_oringC.1 WireHeader5_oringD.1 | length 548.7
  Top Layer w15: U4_oringD.3 589,370.48 ; U4_oringC.3 589,1085.48 ; U4_oringB.3 589,1800.48 ; U4_oringA.3 U4_oringA.2 ; *_TPS6.12 *_TPS6.11 ; *_TPS6.8 *_TPS6.7 ; *_TPS6.20 1784.53,770.47 1810,745 ; KinectReg1.5 2327.2,2117.2 ; R12_TPS6.1@2475,845.04 R12_TPS6.1@2490,860.04 ; 2600,1960 2602.8,1962.8 KinectReg1.1 ; *_TPS5.12 *_TPS5.11 ; *_TPS5.8 *_TPS5.7 ; *_TPS5.20 3084.69,770.31 3110,745 ; v1(3425,1145) C1.2@3505.37,1145 ; R12_TPS5.1@3772.76,844.88 R12_TPS5.1@3787.76,859.88
  other v1: 2185,710 3482.76,709.85 3490,1355 2515,1590 2115,2175
LOW_POWER: J1.1 R3.1 R14.2 U2.6 U5.3 | length 1977.9
  Top Layer w10: R14.2@2194.53,1375 R14.2 J1.1 2455,1510 2575,1510 2725,1660 2725,1890 R3.1 3025.63,2139.37 3015,2150 U5.3@2920,2150 ; U2.6@2200,1740 2290,1650 2290,1555 2200.43,1465.43 R14.2@2200.43,1375
Net1_1: 1.1 D4.1 KinectReg1.8 L1.1 | length 1137.5
  Top Layer w10: 1.1 1985.34,2139.53 1986.63,2140.82 2005,2140.82 ; D4.1 1945,2200.82 2005,2140.82 ; 2327.2,1912.8 KinectReg1.8 ; L1.1@2410.43,1775 2410.43,1837.57 2338,1910 2288.5,1910 2242,1956.5 2242,1957.4 2217.4,1982 2203.47,1982 2132.6,2052.87 2092.94,2052.87 2005,2140.82
Net2_1: 2.1 KinectReg1.3 | length 163.6
  Top Layer w10: KinectReg1.3 2761.57,2067.8 2.1
Net2_2: 2.2 KinectReg1.2 | length 225.1
  Top Layer w10: KinectReg1.2 2702.2,2042.2 2705,2039.41 2705,1980 2759.37,1980 2.2
Net*_TPS5_3: *_TPS5.3 *_TPS5.4 *_TPS5.5 *_TPS5.6 *_TPS6.3 *_TPS6.4 *_TPS6.5 *_TPS6.6 CIN1_TPS5.1 CIN1_TPS6.1 F1.2 | length 2022.1
  Top Layer w10: F1.2@2065,1186.67 F1.2
  Top Layer w40: CIN1_TPS6.1 1609.96,888.58 *_TPS6.6 *_TPS6.5 *_TPS6.4 ; CIN1_TPS6.1@1615.87,969.57 1675,969.57 1675,1044.57 2060,1044.57 ; 2060,1045 F1.2@2060,1185.67 ; F1.2 2379.22,1191 2523.22,1335 2549.92,1335 2603.31,1335 2630,1335 2904.53,1060.47 CIN1_TPS5.1 ; CIN1_TPS5.1@2907.72,969.41 2907.72,888.43 *_TPS5.6 *_TPS5.4
Net*_TPS5_13: *_TPS5.13 *_TPS5.14 *_TPS5.15 *_TPS5.16 Cbst1_TPS5.1 L2_TPS5.2 | length 325.6
  Top Layer w10: *_TPS5.14 *_TPS5.15 *_TPS5.16
  Top Layer w40: L2_TPS5.2@2843.74,609.33 2933.23,698.82 *_TPS5.14 ; L2_TPS5.2@2853.23,599.85 Cbst1_TPS5.1
Net*_TPS5_17: *_TPS5.17 Cbst1_TPS5.2 | length 228.9
  Top Layer w10: *_TPS5.17 2992.28,679.85 2992.76,679.85 3012.76,659.85 3012.76,505.28 Cbst1_TPS5.2@3018.62,499.41
Net*_TPS5_18: *_TPS5.18 Cy1_TPS5.1 | length 259.1
  Top Layer w10: *_TPS5.18 3015.28,717.09 3033.23,699.14 3033.23,618.94 3107.32,544.85 Cy1_TPS5.1@3107.32,499.41
Net*_TPS5_19: *_TPS5.19 Cx1_TPS5.2 | length 311.1
  Top Layer w10: *_TPS5.19@3060.94,750.62 3060.94,716.66 3218.66,558.94 Cx1_TPS5.2
Net*_TPS5_21: *_TPS5.21 RT1_TPS5.2 | length 203.1
  Top Layer w10: *_TPS5.21@3046.53,788.98 3194.25,788.98 RT1_TPS5.2
Net*_TPS5_23: *_TPS5.23 C7_TPS5.2 C8_TPS5.2 | length 454.5
  Top Layer w10: *_TPS5.23@3060.98,829.41 3172.76,829.41 ; 3172.76,829.85 3187.32,844.41 C7_TPS5.2@3237.32,844.41 ; C7_TPS5.2@3237.32,854.41 3237.76,853.98 C7_TPS5.2@3242.32,849.41 ; C7_TPS5.2@3242.32,839.41 3332.76,839.41 3332.76,914.41 ; 3333.19,914.85 C8_TPS5.2@3432.76,914.85
Net*_TPS5_24: *_TPS5.24 C8_TPS5.1 R10_TPS5.2 R11_TPS5.1 R12_TPS5.2 R13_TPS5.2 | length 1898.7
  Top Layer w10: *_TPS5.24@3060.94,849.89 3083.89,849.89 3084.37,849.41 3122.76,849.41 3122.76,983.55 3787.76,983.55 3787.76,924.85 3857.76,924.85 3857.76,559.85 R10_TPS5.2@3788.19,559.85 ; C8_TPS5.1@3432.76,853.98 C8_TPS5.1@3442.32,844.41 ; C8_TPS5.1@3442.32,834.41 3602.76,834.41 3698.19,929.85 3772.76,929.85 R12_TPS5.2@3787.76,914.85 ; R13_TPS5.2 3857.76,738.78
Net*_TPS6_13: *_TPS6.13 *_TPS6.14 *_TPS6.15 *_TPS6.16 Cbst1_TPS6.1 L2_TPS6.2 | length 325.6
  Top Layer w10: *_TPS6.14 *_TPS6.15 *_TPS6.16
  Top Layer w40: L2_TPS6.2@1545.98,609.49 1635.47,698.98 *_TPS6.14 ; L2_TPS6.2@1555.47,600 Cbst1_TPS6.1
Net*_TPS6_17: *_TPS6.17 Cbst1_TPS6.2 | length 228.9
  Top Layer w10: *_TPS6.17 1694.53,680 1695,680 1715,660 1715,505.43 Cbst1_TPS6.2@1720.87,499.57
Net*_TPS6_18: *_TPS6.18 Cy1_TPS6.1 | length 259.1
  Top Layer w10: *_TPS6.18 1717.53,717.24 1735.47,699.3 1735.47,619.09 1809.57,545 Cy1_TPS6.1@1809.57,499.57
Net*_TPS6_19: *_TPS6.19 Cx1_TPS6.2 | length 311.1
  Top Layer w10: *_TPS6.19@1763.19,750.77 1763.19,716.81 1920.91,559.09 Cx1_TPS6.2
Net*_TPS6_21: *_TPS6.21 RT1_TPS6.2 | length 203.1
  Top Layer w10: *_TPS6.21@1748.78,789.13 1896.5,789.13 RT1_TPS6.2
Net*_TPS6_23: *_TPS6.23 C7_TPS6.2 C8_TPS6.2 | length 454.5
  Top Layer w10: *_TPS6.23@1763.22,829.57 1875,829.57 ; 1875,830 1889.57,844.57 C7_TPS6.2@1939.57,844.57 ; C7_TPS6.2@1939.57,854.57 1940,854.13 C7_TPS6.2@1944.57,849.57 ; C7_TPS6.2@1944.57,839.57 2035,839.57 2035,914.57 ; 2035.43,915 C8_TPS6.2@2135,915
Net*_TPS6_24: *_TPS6.24 C8_TPS6.1 R10_TPS6.2 R11_TPS6.1 R12_TPS6.2 R13_TPS6.2 | length 1898.7
  Top Layer w10: *_TPS6.24@1763.19,850.05 1786.13,850.05 1786.61,849.57 1825,849.57 1825,983.7 2490,983.7 2490,925 2560,925 2560,560 R10_TPS6.2@2490.43,560 ; C8_TPS6.1@2135,854.13 C8_TPS6.1@2144.57,844.57 ; C8_TPS6.1@2144.57,834.57 2305,834.57 2400.43,930 2475,930 R12_TPS6.2@2490,915 ; R13_TPS6.2 2560,738.94
NetC4_1: C4.1 D4.2 R8.2 | length 334.6
  Top Layer w10: D4.2 C4.1 R8.2@1824.09,2400.47
NetC4_2: C4.2 KinectReg1.4 R8.1 R9.2 | length 1153.1
  Top Layer w10: C4.2 1950.24,2459.53 ; 1950.24,2459.76 2205,2205 R9.2 2525.63,2130.63 2526.26,2130 2566.18,2130 KinectReg1.4
NetC6_TPS5_2: C6_TPS5.2 R10_TPS5.1 | length 130.7
  Top Layer w10: C6_TPS5.2 3788.19,495.32 R10_TPS5.1
NetC6_TPS6_2: C6_TPS6.2 R10_TPS6.1 | length 130.7
  Top Layer w10: C6_TPS6.2 2490.43,495.47 R10_TPS6.1
NetC7_TPS5_1: C7_TPS5.1 R11_TPS5.2 | length 460
  Top Layer w10: C7_TPS5.1@3237.76,914.85 3237.76,959.85 3602.76,959.85 R11_TPS5.2@3602.76,909.85
NetC7_TPS6_1: C7_TPS6.1 R11_TPS6.2 | length 460
  Top Layer w10: C7_TPS6.1@1940,915 1940,960 2305,960 R11_TPS6.2@2305,910
NetD2_2: D2.2 R6.1 | length 495.6
  Top Layer w10: R6.1@3634.37,1995 3855,1995 D2.2
NetD3_1: D3.1 R7.1 | length 428.1
  Top Layer w10: D3.1 3495,2420 3525,2390 R7.1
NetF1_1: F1.1 S1.2 | length 3481.2
  Top Layer w40: 1440,2374.73 1440,1361.67 F1.1 ; 1440.27,2374.73 1612.48,2546.93 1940.85,2546.93 2027.78,2460 3165,2460 3280,2575 3280,2800 S1.2
NetF2_oringA_2: F2_oringA.2 U3_oringA.1 U3_oringA.2 U3_oringA.3 | length 172.6
  Top Layer w40: U3_oringA.1@837.2,2367.32 U3_oringA.2 ; F2_oringA.2 879.33,2366.65 U3_oringA.2 ; 917.2,2367.32 U3_oringA.2
NetF2_oringB_2: F2_oringB.2 U3_oringB.1 U3_oringB.2 U3_oringB.3 | length 172.6
  Top Layer w40: U3_oringB.1@837.2,1653.4 U3_oringB.2 ; F2_oringB.2 879.33,1652.73 U3_oringB.2 ; 917.2,1653.4 U3_oringB.2
NetF2_oringC_2: F2_oringC.2 U3_oringC.1 U3_oringC.2 U3_oringC.3 | length 172.6
  Top Layer w40: U3_oringC.1@837.2,938.4 U3_oringC.2 ; F2_oringC.2 879.33,937.73 U3_oringC.2 ; 917.2,938.4 U3_oringC.2
NetF2_oringD_2: F2_oringD.2 U3_oringD.1 U3_oringD.2 U3_oringD.3 | length 172.6
  Top Layer w40: U3_oringD.1@837.2,223.4 U3_oringD.2 ; F2_oringD.2@879.33,131.08 879.33,222.73 U3_oringD.2 ; 917.2,223.4 U3_oringD.2
NetR1_1: R1.1 R2.2 | length 285.3
  Top Layer w10: R1.1 1810,1405 1870,1465 R2.2@1985.47,1465
NetR4_1: R4.1 U2.2 | length 394.6
  Top Layer w10: R4.1@1889.57,2065 1810,2065 1810,1840 U2.2@1900,1840
NetR5_2: R5.2 R14.1 U2.3 | length 551.4
  Top Layer w10: U2.3@1900,1740 2130,1510 2130,1375.43 R14.1@2129.57,1375 ; R5.2@2044.53,1375 R14.1@2129.57,1375 ; R14.1@2135.47,1375 R14.1@2129.57,1375
NetR6_2: R6.2 R7.2 U5.1 U5.2 | length 1143.9
  Top Layer w10: U5.2@2920,2250 2920,2350 3010,2350 3010,2405 3192.32,2405 3194.32,2407 3363,2407 3465,2305 3465,2075 3465.63,2075.63 R7.2 3633.74,2075.63 R6.2
NetU3_oringA_4: U3_oringA.4 U4_oringA.5 | length 650.7
  Top Layer w10: U4_oringA.5 727.6,2525 782.2,2470.39 782.2,2280.87 852.6,2210.47 906.06,2210.47 977.8,2282.21 U3_oringA.4@977.8,2365.12
NetU3_oringB_4: U3_oringB.4 U4_oringB.5 | length 650.7
  Top Layer w10: U4_oringB.5 727.6,1811.08 782.2,1756.47 782.2,1566.95 852.6,1496.55 906.06,1496.55 977.8,1568.29 U3_oringB.4@977.8,1651.2
NetU3_oringC_4: U3_oringC.4 U4_oringC.5 | length 650.7
  Top Layer w10: U4_oringC.5 727.6,1096.08 782.2,1041.47 782.2,851.95 852.6,781.55 906.06,781.55 977.8,853.29 U3_oringC.4@977.8,936.2
NetU3_oringD_4: U3_oringD.4 U4_oringD.5 | length 650.7
  Top Layer w10: U4_oringD.5 727.6,381.08 782.2,326.47 782.2,136.95 852.6,66.55 906.06,66.55 977.8,138.29 U3_oringD.4@977.8,221.2
VORED4: S1.1 U3_oringA.5 U3_oringA.6 U3_oringA.7 U3_oringA.8 U3_oringB.5 U3_oringB.6 U3_oringB.7 U3_oringB.8 U3_oringC.5 U3_oringC.6 U3_oringC.7 U3_oringC.8 U3_oringD.5 U3_oringD.6 U3_oringD.7 U3_oringD.8 U4_oringA.6 U4_oringB.6 U4_oringC.6 U4_oringD.6 | length 6031.2
  Top Layer w40: U4_oringD.6@691.26,428.74 773.6,511.08 U3_oringD.5@975,511.08 ; U4_oringC.6@691.26,1143.74 773.6,1226.08 U3_oringC.5@975,1226.08 ; U4_oringB.6@691.26,1858.74 773.6,1941.08 U3_oringB.5@975,1941.08 ; U4_oringA.6@691.26,2572.66 773.6,2655 U3_oringA.5@975,2655 ; 940,1100 1345,1100 ; 950,2540 1345,2540 ; 955,395 1345,395 1345,1100 ; 960,1790 1345,1790 ; S1.1 1610,2805 1345,2540 ; 1345,1100 1345,1790 ; 1345,1790 1345,2540
VREF: R1.3 R5.1 | length 542.1
  Top Layer w10: R1.3@1520,1500 1675,1345 1945.63,1345 R5.1 R5.1@1985.47,1375
pads on no net: *_TPS5.1 *_TPS5.2 *_TPS5.22 *_TPS5.25 *_TPS5.V *_TPS6.1 *_TPS6.2 *_TPS6.22 *_TPS6.25 *_TPS6.V KinectReg1.6 U1.4 U2.1 U2.5 U2.8 U4_oringA.1 U4_oringB.1 U4_oringC.1 U4_oringD.1 U5.5 U5.6 U5.7
copper on no net: | length 150.7
  Top Layer w10: 2690,1930 2691.93,1928.07 2823.07,1928.07 2835,1940

## Polygon pours and split planes (outlines as drawn)
GND on Top Layer "TopPlane" (solid, pour order 6): 0,3000 3985,3000 3985,0 0,0
GND on Bottom Layer "BottomPlane" (solid, pour order 4): 0,0 4000,0 4000,3000 0,3000

## Keep-outs
Keep-Out Layer:
  the board outline again, w10

## Other copper
Top Layer:
  text "INVESTIGATORS POWER BOARD V2" at 2155,160 h30
  text "DANIEL JENSEN, KEVIN FRENCH" at 2095,75 h30

## Text inside footprints (layer, text, board x,y; h text height)
*_TPS5: Top Overlay "*" at 3036.81,919.33 h50 r270; Top Overlay "PN" at 2962.76,799.84 h50 r270; Top Overlay "DEV" at 2962.76,799.84 h50 r270; Top Overlay "VAL" at 2962.76,799.84 h50 r270; Top Overlay "TOL" at 2962.76,799.84 h50 r270; Mechanical 1 "*" at 3036.81,919.33 h50 r270; Mechanical 1 "RefDes2" at 2962.76,799.84 h50 r270
*_TPS6: Top Overlay "*" at 1739.06,919.49 h50 r270; Top Overlay "PN" at 1665,800 h50 r270; Top Overlay "DEV" at 1665,800 h50 r270; Top Overlay "VAL" at 1665,800 h50 r270; Top Overlay "TOL" at 1665,800 h50 r270; Mechanical 1 "*" at 1739.06,919.49 h50 r270; Mechanical 1 "RefDes2" at 1665,800 h50 r270
KinectReg1: Top Overlay "*" at 2618.54,1978.23 h50 r180; Mechanical 1 "*" at 2618.54,1978.23 h50 r180
U1: Top Overlay "TOL" at 3780,1650 h20; Top Overlay "VAL" at 3780,1650 h20; Top Overlay "DEV" at 3780,1650 h20; Top Overlay "PN" at 3780,1650 h20; Top Overlay "*" at 3605,1324 h20; Mechanical 1 "RefDes2" at 3780,1650 h20; Mechanical 1 "*" at 3605,1324 h20
U2: Top Overlay "TOL" at 2055,1790 h20; Top Overlay "VAL" at 2055,1790 h20; Top Overlay "DEV" at 2055,1790 h20; Top Overlay "PN" at 2055,1790 h20; Top Overlay "*" at 1905,1997 h20; Mechanical 1 "RefDes2" at 2055,1790 h20; Mechanical 1 "*" at 1905,1997 h20
U4_oringA: Top Overlay "TOL" at 635,2525 h20; Top Overlay "VAL" at 635,2525 h20; Top Overlay "DEV" at 635,2525 h20; Top Overlay "PN" at 635,2525 h20; Top Overlay "*" at 579,2607.9 h20; Mechanical 1 "RefDes2" at 635,2525 h20; Mechanical 1 "*" at 579,2607.9 h20
U4_oringB: Top Overlay "TOL" at 635,1811.08 h20; Top Overlay "VAL" at 635,1811.08 h20; Top Overlay "DEV" at 635,1811.08 h20; Top Overlay "PN" at 635,1811.08 h20; Top Overlay "*" at 579,1893.98 h20; Mechanical 1 "RefDes2" at 635,1811.08 h20; Mechanical 1 "*" at 579,1893.98 h20
U4_oringC: Top Overlay "TOL" at 635,1096.08 h20; Top Overlay "VAL" at 635,1096.08 h20; Top Overlay "DEV" at 635,1096.08 h20; Top Overlay "PN" at 635,1096.08 h20; Top Overlay "*" at 579,1178.98 h20; Mechanical 1 "RefDes2" at 635,1096.08 h20; Mechanical 1 "*" at 579,1178.98 h20
U4_oringD: Top Overlay "TOL" at 635,381.08 h20; Top Overlay "VAL" at 635,381.08 h20; Top Overlay "DEV" at 635,381.08 h20; Top Overlay "PN" at 635,381.08 h20; Top Overlay "*" at 579,463.98 h20; Mechanical 1 "RefDes2" at 635,381.08 h20; Mechanical 1 "*" at 579,463.98 h20
U5: Top Overlay "TOL" at 3070,2195 h50; Top Overlay "VAL" at 3070,2195 h50; Top Overlay "DEV" at 3070,2195 h50; Top Overlay "PN" at 3070,2195 h50; Top Overlay "*" at 2920,2402 h50; Mechanical 1 "RefDes2" at 3070,2195 h50; Mechanical 1 "*" at 2920,2402 h50